# Altium PCB nrf52833_qdaa_var5.PcbDoc
Units mil, origin at the board's own origin, x right, y up, seen from the top; angles counter-clockwise.
Board outline 629.92 x 551.18 mil, 4 copper layers (Top Layer, Mid-Layer 1, Mid-Layer 2, Bottom Layer), stack 93.8 mil thick; 28 components, 37 nets, 98 pads, 57 vias.
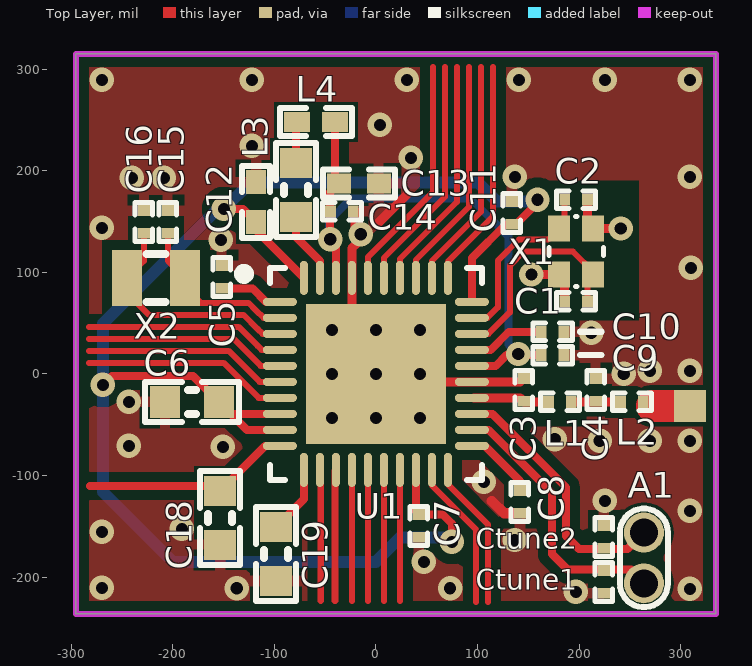
[diagram p0: Top Layer view]
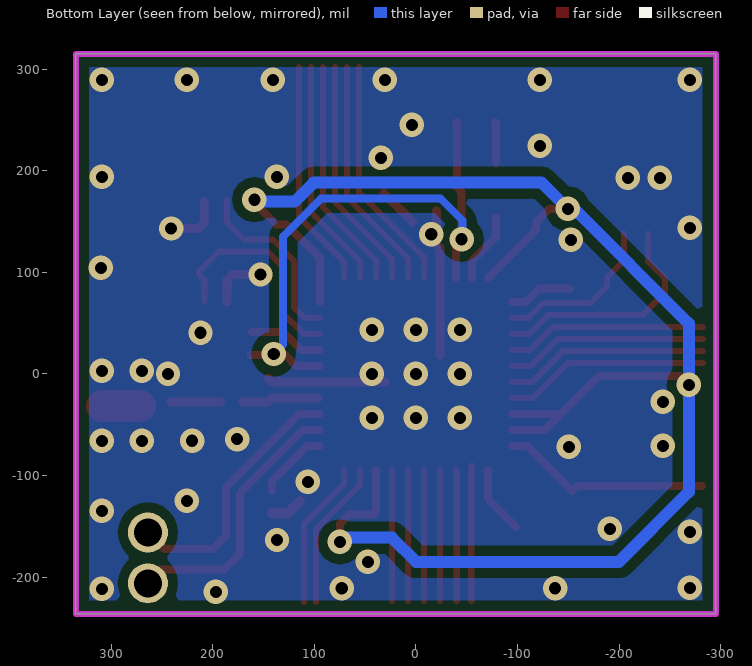
[diagram p1: Bottom Layer view, seen from below]
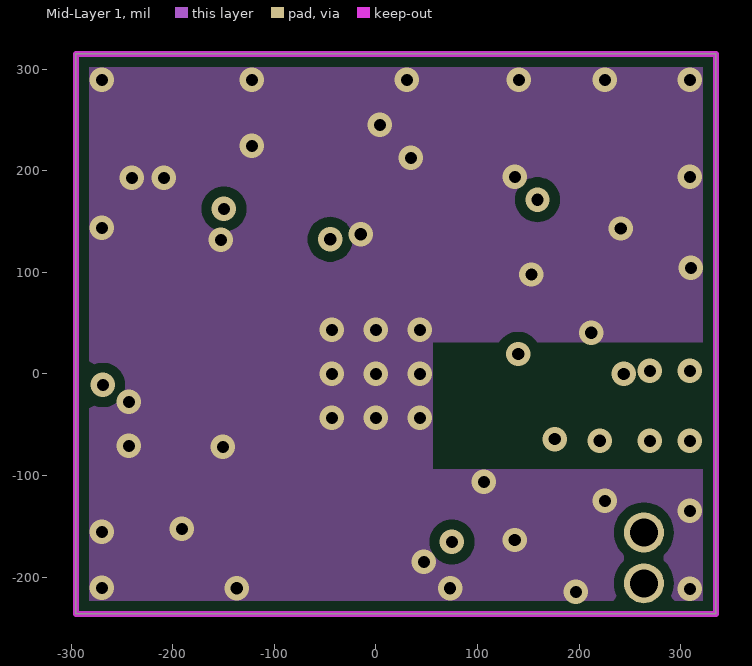
[diagram p2: Mid-Layer 1]
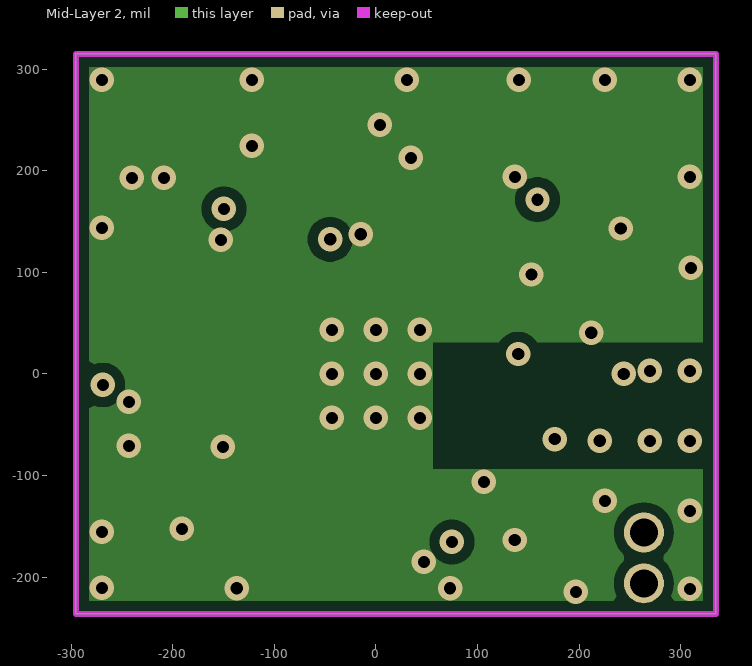
[diagram p3: Mid-Layer 2]
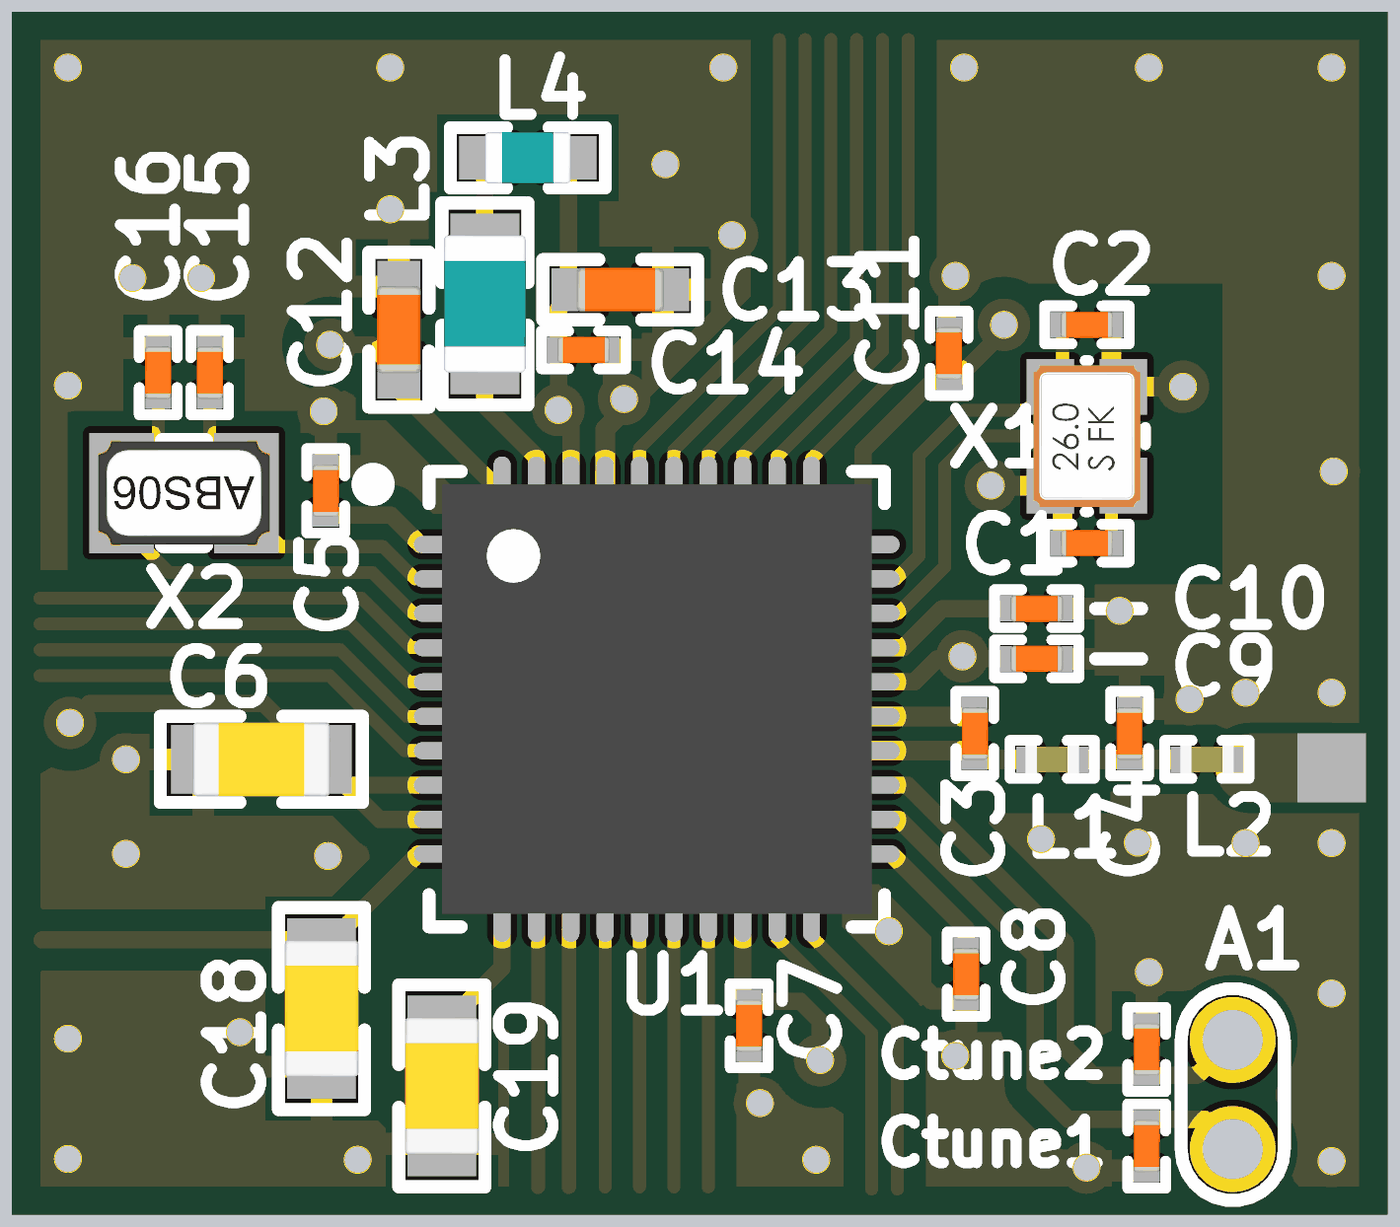
[diagram p4: 3D render of the assembled board from above, using the file's embedded part models]

## Layer stack, top to bottom
Top Solder: solder mask 0.4, Solder Resist, Dk 3.5
Top Layer: signal copper 1.4
Dielectric1: core 63, FR-4, Dk 4.8
Mid-Layer 1: signal copper 1.4
Dielectric2: dielectric 12.6, FR-4, Dk 4.8
Mid-Layer 2: signal copper 1.4
Dielectric3: dielectric 12.6, FR-4, Dk 4.8
Bottom Layer: signal copper 1.4
Bottom Solder: solder mask 0.4, Solder Resist, Dk 3.5

## Board outline
-295.28,-236.22 334.65,-236.22 334.65,314.96 -295.28,314.96

## Design rules (kind name [scope] priority, off if disabled: settings)
Clearance Polygon_ANT [(InNamedPolygon('Top_Layer-GND')) or (InNamedPolygon('Bottom_Layer-GND')) vs InNet('RF')] p1: gap=4.92 ignorepadtopadclearanceinfootprint=FALSE
Clearance Polygon [(InNamedPolygon('Top_Layer-GND')) or (InNamedPolygon('Bottom_Layer-GND')) or (InNamedPolygon('Mid_Layer_1-GND')) or (InNamedPolygon('Mid_Layer_2-GND'))] p2: gap=10 ignorepadtopadclearanceinfootprint=FALSE except(0: Arc-Hole Track-Hole SMDPad-Hole THPad-Hole Via-Hole Fill-Hole Poly-Hole Region-Hole Text-Hole)
Clearance [All] p3: gap=5.91 ignorepadtopadclearanceinfootprint=FALSE
ComponentClearance [All] p1 off: gap=10 collisioncheckmode=3 verticalgap=10 showdistances=FALSE
FabricationTestPointUsage TestPointUsage [All] p1: valid=0 allowmultiple=FALSE
FabricationTestpoint Testpoint [All] p1: side=3 testpointundercomponent=TRUE minsize=40 maxsize=100 preferedsize=60 minholesize=0 maxholesize=40 preferedholesize=32 testpointgrid=1 allowsidetop=TRUE allowsidebottom=TRUE usegrid=TRUE gridtolerance=0.01
Height [All] p1 off: minheight=0 maxheight=1000 prefheight=500
HoleSize [All] p1: absolutevalues=TRUE maxlimit=160 minlimit=12 maxpercent=80.000 minpercent=20.000
MinimumAnnularRing [All] p1 off: minimumring=6
PolygonConnect PolygonConnect_1 [isVia and innet(gnd)] p1: connectstyle=Direct reliefconductorwidth=10 reliefentries=4 polygonreliefangle="90 Angle" airgapwidth=10
PolygonConnect [All] p2: connectstyle=Relief reliefconductorwidth=10 reliefentries=4 polygonreliefangle="90 Angle" airgapwidth=10
RoutingVias [All] p1: holewidth=16 width=32 viastyle="Through Hole" minholewidth=10 minwidth=10 maxholewidth=28 maxwidth=50
SilkToSolderMaskClearance SilkscreenOverComponentPads [IsPad] p1: minsilkscreentomaskgap=10 clearancetoexposedcopper=TRUE
SolderMaskExpansion [All] p1: expansion=3 istentingtop=FALSE
Width [All] p1: maxlimit=100 minlimit=5.91 preferedwidth=5.91
24 further rules are at their usual default settings.

## Components (designator, comment, footprint, x,y, rotation, side; value= is the part's Value field where it differs from the comment)
A1 "NFC Antenna" TP_2x1mm_TH 263.78,-181.1 r180 top
C1 "12pF" CAPC0603X03L_C#1 197,71.5 r180 top
C2 "12pF" CAPC0603X03L_C#1 197,171.5 r0 top
C3 "1.0pF" CAPC0603X03L_C#1 145.67,-15.75 r270 top
C4 "1.2pF" CAPC0603X03L_C#1 216.54,-15.75 r270 top
C5 "100nF" CAPC0603X03L_C#1 -151.57,95.47 r90 top
C6 "4.7µF" CAPC1608X06L -181.1,-27.56 r180 top
C7 "100nF" CAPC0603X03L_C#1 42.32,-149.61 r270 top
C8 "820pF" CAPC0603X03L_C#1 141.73,-125.98 r270 top
C9 "N.C." CAPC0603X03L_C#2 174,18.5 r180 top
C10 "100pF" CAPC0603X03L_C#1 174,41.5 r0 top
C11 "100nF" CAPC0603X03L_C#1 133.86,158.46 r90 top
C12 "1.0µF" CAPC1005X04L -118.11,169.29 r90 top
C13 "1.0µF" CAPC1005X04L -16.75,187.6 r180 top
C14 "47nF" CAPC0603X03L_C#1 -33.5,160.04 r0 top
C15 "12pF" CAPC0603X03L_C#1 -204.72,149.61 r90 top
C16 "12pF" CAPC0603X03L_C#1 -228.35,149.61 r90 top
C18 "4.7µF" CAPC1608X06L -153.54,-141.73 r270 top
C19 "4.7µF" CAPC1608X06L -98.43,-177.17 r270 top
Ctune1 "TBD" CAPC0603X03L_C#1 224.41,-204.72 r270 top
Ctune2 "TBD" CAPC0603X03L_C#1 224.41,-160.43 r270 top
L1 "4.7nH" INDC0603X03L_C 181.1,-27.56 r0 top
L2 "2.2nH" INDC0603X03L_C 251.97,-27.56 r0 top
L3 "10µH" INDC1608X06L -78.74,181.1 r270 top
L4 "15nH" INDC1005X04L -59.06,248.03 r180 top
U1 "nRF52833-QDAA" QFN40P500X500X50_HS-41N 0,0 r0 top locked
X1 "32MHz" BT-XTAL_1612 197,120.5 r90 top
X2 "32.768kHz" XTAL_2012 -216.54,94.49 r180 top

## Footprints (in the part's own frame and the unit in brackets; to place one, negate y for a bottom-side part, rotate by r counter-clockwise, add the part's x,y. Pads: shape width x height; smd on the part's side, far side on the other; paste and mask are expansions set on the pad)
BT-XTAL_1612 [mm] "Crystal 1.6 x 1.2 mm"
  rect 0.65x0.55 smd: 1(-0.575,-0.425) 2(0.575,-0.425) 3(0.575,0.425) 4(-0.575,0.425)
  silkscreen extent -0.88,-0.68 0.88,0.68, body extent -0.83,-0.63 0.83,0.63, height 0.41
CAPC0603X03L_C#1 [mm] "Chip Capacitor, 2-Leads, Body 0.6x0.3mm, IPC High Density"
  rect 0.27x0.3 smd: 1(-0.285,0) 2(0.285,0)
  silkscreen extent -0.49,-0.22 0.49,0.22, body extent -0.3,-0.15 0.31,0.15, height 0.3
CAPC0603X03L_C#2 [mm] "Chip Capacitor, 2-Leads, Body 0.6x0.3mm, IPC High Density"
  rect 0.27x0.3 smd mask+0.05: 1(-0.285,0) 2(0.285,0)
  silkscreen extent -0.49,-0.22 0.49,0.22, body extent -0.3,-0.15 0.31,0.15, height 0.3
CAPC1005X04L [mm] "Chip Capacitor, 2-Leads, Body 1.0x0.5mm, IPC High Density"
  rect 0.6x0.5 smd: 1(-0.5,0) 2(0.5,0)
  silkscreen extent -0.9,-0.35 0.9,0.35, body extent -0.51,-0.25 0.51,0.25, height 0.5
CAPC1608X06L [mm] "Chip Capacitor, 2-Leads, Body 1.6x0.8mm, IPC High Density"
  rect 0.75x0.8 smd: 1(-0.675,0) 2(0.675,0)
  silkscreen extent -1.17,-0.5 1.17,0.5, body extent -0.8,-0.43 0.8,0.43, height 0.8
INDC0603X03L_C [mm] "Chip Inductor, 2-Leads, Body 0.6x0.3mm, IPC High Density"
  rect 0.27x0.3 smd: 1(-0.285,0) 2(0.285,0)
  silkscreen extent -0.49,-0.22 0.49,0.22, body extent -0.31,-0.16 0.31,0.16, height 0.26
INDC1005X04L [mm] "Chip Inductor, 2-Leads, Body 1.0x0.5mm, IPC High Density"
  rect 0.65x0.5 smd: 1(-0.475,0) 2(0.475,0)
  silkscreen extent -0.9,-0.35 0.9,0.35, body extent -0.5,-0.3 0.5,0.3, height 0.5
INDC1608X06L [mm] "Chip Inductor, 2-Leads, Body 1.6x0.8mm, IPC High Density"
  rect 0.75x0.8 smd: 1(-0.675,0) 2(0.675,0)
  silkscreen extent -1.17,-0.5 1.17,0.5, body extent -0.8,-0.48 0.8,0.48, height 0.8
QFN40P500X500X50_HS-41N [mm] "QFN, 40-Leads, Body 5.00x5.00mm, Pitch 0.40mm, Thermal Pad 3.60x3.60mm, IPC Medium Density"
  oval 0.85x0.2 smd: 1(-2.4,1.8) 2(-2.4,1.4) 3(-2.4,1) 4(-2.4,0.6) 5(-2.4,0.2) 6(-2.4,-0.2) 7(-2.4,-0.6) 8(-2.4,-1) 9(-2.4,-1.4) 10(-2.4,-1.8) 21(2.4,-1.8) 22(2.4,-1.4) 23(2.4,-1) 24(2.4,-0.6) 25(2.4,-0.2) 26(2.4,0.2) 27(2.4,0.6) 28(2.4,1) 29(2.4,1.4) 30(2.4,1.8)
  oval 0.2x0.85 smd: 11(-1.8,-2.4) 12(-1.4,-2.4) 13(-1,-2.4) 14(-0.6,-2.4) 15(-0.2,-2.4) 16(0.2,-2.4) 17(0.6,-2.4) 18(1,-2.4) 19(1.4,-2.4) 20(1.8,-2.4) 31(1.8,2.4) 32(1.4,2.4) 33(1,2.4) 34(0.6,2.4) 35(0.2,2.4) 36(-0.2,2.4) 37(-0.6,2.4) 38(-1,2.4) 39(-1.4,2.4) 40(-1.8,2.4)
  rect 3.5x3.5 smd: 41(0,0)
  silkscreen extent -3.42,-2.65 2.65,2.65, body extent -2.5,-2.5 2.5,2.5, height 0.5
TP_2x1mm_TH [mm]
  round 1 hole 0.7: 1(0,-0.635) 2(0,0.635)
  silkscreen extent -0.6,-1.23 0.6,1.23
XTAL_2012 [mm] "XTAL SMD 2.0 x 1.2 mm"
  rect 0.75x1.4 smd: 1(-0.725,0) 2(0.725,0)
  silkscreen extent -0.24,-0.6 0.24,0.6, body extent -1,-0.61 1,0.61, height 0.6

## Part data
A1: library part NFC_ANT_TP, Footprint Doc=TP_2x1mm_TH, LatestRevisionDate=2016-02-23, Part Number=NFC_ANT_TP, Pin Count=2, Published=2016-02-23, Publisher="Nordic Semiconductor"
C1 C2 C15 C16: library part C0201-12p, "Capacitor, NP0, ±2%", Footprint Doc=0201, LatestRevisionDate=2017-11-09, Part Number=C0201-12p, Pin Count=2, Published=2014-11-13, Publisher="Nordic Semiconductor"
C3: library part C0201-1.0p, "Capacitor, NP0, ±5%", Footprint Doc=0201, LatestRevisionDate=2018-10-22, Part Number=C0201-1.0p, Pin Count=2, Published=2014-11-13, Publisher="Nordic Semiconductor"
C4: library part C0201-1.2p, "Capacitor, NP0, ±5%", Footprint Doc=0201, LatestRevisionDate=2014-11-13, Part Number=C0201-1.2p, Pin Count=2, Published=2014-11-13, Publisher="Nordic Semiconductor"
C5 C7 C11: library part C0201-100n, "Capacitor, X7S, ±10%", Footprint Doc=0201, LatestRevisionDate=2017-11-09, Part Number=C0201-100n, Pin Count=2, Published=2014-11-13, Publisher="Nordic Semiconductor"
C6 C19: library part C0603-4µ7-6.3V-X7R, "Capacitor, X7R, ±10%", Footprint Doc=0603, LatestRevisionDate=2015-06-10, Part Number=C0603-4µ7-6.3V-X7R, Pin Count=2, Published=2015-06-10, Publisher="Nordic Semiconductor"
C8: library part C0201-820p, "Capacitor, X7R, ±10%", Assembly="Not required for Bxx and later", Footprint Doc=0201, LatestRevisionDate=2017-11-09, Part Number=C0201-820p, Pin Count=2, Published=2014-11-13, Publisher="Nordic Semiconductor"
C9: library part C0201-N.C., "Not mounted", Assembly="Not mounted", Footprint Doc=0201, LatestRevisionDate=2014-11-13, Part Number=C0201-N.C., Pin Count=2, Published=2014-11-13, Publisher="Nordic Semiconductor"
C10: library part C0201-100p, "Capacitor, NP0, ±5%", Footprint Doc=0201, LatestRevisionDate=2017-11-09, Part Number=C0201-100p, Pin Count=2, Published=2014-11-13, Publisher="Nordic Semiconductor"
C12 C13: library part C0402-1µ0, "Capacitor, X7S, ±10%", Footprint Doc=0402, LatestRevisionDate=2016-08-22, Part Number=C0402-1µ0, Pin Count=2, Published=2009-05-08, Publisher="Nordic Semiconductor"
C14: library part C0201-47n, "Capacitor, X7S, ±10%", Footprint Doc=0201, LatestRevisionDate=2017-11-09, Part Number=C0201-47n, Pin Count=2, Published=2014-11-13, Publisher="Nordic Semiconductor"
C18: library part C0603-4µ7-10V-X7S, "Capacitor, X7S, ±10%", Footprint Doc=0603, LatestRevisionDate=2016-08-15, Part Number=C0603-4µ7-10V-X7S, Pin Count=2, Published=2016-08-15, Publisher="Nordic Semiconductor"
Ctune1 Ctune2: library part C0201-TBD, "Capacitor, X7R, ±10%", Footprint Doc=0201, LatestRevisionDate=2014-11-13, Part Number=C0201-TBD, Pin Count=2, Published=2014-11-13, Publisher="Nordic Semiconductor"
L1: library part L0201-4n7, "High frequency chip inductor ±5%", Footprint Doc=0201, LatestRevisionDate=2013-04-10, Part Number=L0201-4n7, Pin Count=2, Published=2013-04-10, Publisher="Nordic Semiconductor"
L2: library part L0201-2n2, "High frequency chip inductor ±5%", Footprint Doc=0201, LatestRevisionDate=2013-04-10, Part Number=L0201-2n2, Pin Count=2, Published=2013-04-10, Publisher="Nordic Semiconductor"
L3: library part L0603-10µ-TDK, "Chip inductor, IDC,min = 50 mA, ±20%", Footprint Doc=0603, LatestRevisionDate=2012-09-19, Part Number=L0603-10µ-TDK, Pin Count=2, Published=2019-05-06, Publisher="Nordic Semiconductor"
L4: library part L0402-15n, "High frequency chip inductor ±10%", Footprint Doc=0402, LatestRevisionDate=2012-09-19, Part Number=L0402-15n, Pin Count=2, Published=2010-07-12, Publisher="Nordic Semiconductor"
U1: "Multi-protocol Bluetooth Low Energy, IEEE 802.15.4, ANT and 2.4GHz proprietary system-on-chip", Manufacturer="Nordic Semiconductor", Footprint Doc=QFN-40, LatestRevisionDate=2018-12-03, Manufacturer Part Number=nRF52833-QDAA, Part Number=nRF52833-QDAA, Pin Count=40, Published=2018-12-03, Publisher="Nordic Semiconductor"
X1: library part XTAL_SMD1612_32MHz_8pF_General, "XTAL SMD 1612, 32MHz, Cl=8pF, Total Tol: ±40ppm", Footprint Doc=XTAL_1612, LatestRevisionDate=2016-08-19, Part Number=XTAL_SMD1612_32MHz_8pF_General, Pin Count=4, Published=2016-08-19, Publisher="Nordic Semiconductor"
X2: library part XTAL_SMD2012_32.768kHz_9pF_General, "XTAL SMD 2012, 32.768kHz, Cl=9pF, Total Tol: ±50ppm", Footprint Doc=XTAL_2012, LatestRevisionDate=2017-01-11, Part Number=XTAL_SMD2012_32.768kHz_9pF_General, Pin Count=2, Published=2016-08-19, Publisher="Nordic Semiconductor"

## Free pads (board coordinates)
  rect 31.5x31.5 smd mask+3: 0(309.05,-31.5)

## Via types
v1: diameter 24, hole 12, Top Layer to Bottom Layer, tented both sides, 48 vias
v2: diameter 24, hole 12, Top Layer to Bottom Layer, 9 vias

## Nets (pads, with @x,y where several pads share a name; then routed paths per layer and width w, separated by ;. In a path a pad name is that pad's centre, name@x,y a point inside that pad or via, vN(x,y) a via of type N, cw(c..) or ccw(c..) an arc to the next point about the centre after c; other vN are vias at no path point)
D+: U1.13 | length 129.3
  Top Layer w6.5: -40.24,-223.43 -40.24,-95.35 U1.13
D-: U1.12 | length 133.2
  Top Layer w6.5: U1.12@-55.12,-90.55 U1.12 -54.33,-95.28 -54.33,-223.43
DEC1: C5.1 U1.1 | length 62.6
  Top Layer w7.87: C5.1 -121.62,84.25 -108.24,70.87 U1.1
DEC3: C10.1 U1.27 | length 74.9
  Top Layer w7.87: U1.27 112.93,23.62 130.76,41.45 C10.1@162,41.45
DEC4_6: C9.2 C13.2 C14.1 L4.1 U1.26 U1.38 | length 572.2
  Top Layer w7.87: v1(-45,132.5) -45,179.03 -39.37,184.66 C13.2 ; v1@-44.72,132.79 -42.43,130.5 -39.37,130.5 U1.38 ; C13.2@-40.35,187.6 L4.1 L4.1@-39.37,247.05 ; U1.26 117.91,7.87 128.54,18.5 C9.2
  Bottom Layer w7.87: v1@-46,134.5 -46,150.85 -24.42,172.43 93.31,172.43 130.62,135.13 130.62,28.98 v1(140,19.61)
GND: C1.2 C2.2 C3.1 C4.1 C5.2 C6.2 C7.2 C8.2 C9.1 C10.2 C11.2 C12.2 C13.1 C14.2 C15.2 C16.2 C18.2 C19.2 Ctune1.2 Ctune2.1 U1.25 U1.37 U1.41 X1.2 X1.4 | length 455
  Top Layer w9: U1.41@-23.62,18.5 -23.62,123.65 -14.76,132.5 v1@-14.76,143.7 ; C14.2@-20.28,160.04 -20.28,141.78 v1@-15,136.5 ; 3.25,149.5 31.25,177.5 ; U1.41@30.51,-7.87 141.97,-7.87 C3.1@145.32,-4.53 ; v1(153,97.87) X1.4 185.78,92.35 C1.2 ; C2.2@208.22,169.5 208.22,148.65 X1.2 v1(241,143.14)
  Top Layer w10: 114,-125 126.2,-137.2 C8.2
  other v1: 196.85,-214.57 309.06,-211.61 -269.69,-210.63 -137,-211 73,-211 47.24,-185.04 136.73,-163.42 -269.69,-155.51 -190.94,-152.56 309.06,-134.84 225.39,-125 106.3,-106.3 -150.59,-71.85 -243.11,-70.87 220.32,-65.73 269.68,-65.94 309.06,-65.94 176,-64.13 -243.11,-27.56 244,0 269.68,2.95 309.06,2.95 212,40.5 310.04,104.33 -152.56,131.89 -15,137.49 -269.69,143.7 -240.16,192.91 -208.66,192.91 136.81,193.9 309.06,193.9 34.45,212.6 -122.05,224.41 3.94,245.08 -269.69,289.37 -122.05,289.37 30.51,289.37 140.75,289.37 225.39,289.37 309.06,289.37
  other v2: -43.31,-43.31 0,-43.31 43.31,-43.31 -43.31,0 0,0 43.31,0 -43.31,43.31 0,43.31 43.31,43.31
NetC3_2: C3.2 L1.1 U1.24 | length 75.1
  Top Layer w9: U1.24@96.46,-23.62 141.97,-23.62 145.32,-26.97 145.9,-27.56 L1.1
NetC4_2: C4.2 L1.2 L2.1 | length 48.4
  Top Layer w9: L1.2 L2.1
NetC8_1: C8.1 U1.21 | length 71
  Top Layer w7.87: U1.21 107.28,-70.87 141.73,-105.31 C8.1
NetC19_1: C19.1 U1.11 | length 67.5
  Top Layer w7.87: C19.1 -70.87,-123.03 U1.11
NetL3_1: L3.1 L4.2 | length 40.8
  Top Layer w7.87: L3.1 -78.74,247.05 L4.2
NetL3_2: L3.2 U1.39 | length 69.8
  Top Layer w7.87: L3.2 -78.74,134.64 -55.12,111.02 U1.39
NFC1: A1.2 Ctune1.1 U1.22 | length 267.9
  Top Layer w7.87: U1.22 111.02,-55.12 173.23,-117.32 173.23,-177.17 188.58,-192.52 A1.2@250.2,-192.52 ; A1.2@251.18,-192.52 A1.2@250.2,-192.52 ; A1.2 A1.2@250.2,-192.52
NFC2: A1.1 Ctune2.2 U1.23 | length 259
  Top Layer w7.87: U1.23 114.76,-39.37 187.01,-111.62 187.01,-159.45 199.8,-172.24 247.64,-172.24 A1.1
P0.00/XL1: C15.1 U1.2 X2.1 | length 165.8
  Top Layer w5.91: C15.1 -204.72,111.22 X2.1 -187.99,85.63 -172.24,69.88 -125.41,69.88 -118.18,62.65 -118.11,62.65 -110.58,55.12 U1.2
P0.01/XL2: C16.1 U1.3 X2.2 | length 232.9
  Top Layer w5.91: C16.1 -228.35,111.22 X2.2 -245.08,79.72 -223.43,58.07 -130.31,58.07 -116.21,43.97 -116.14,43.97 -111.54,39.37 U1.3
P0.02/AIN0: U1.32 | length 227.7
  Top Layer w5.91: U1.32 55.12,111.19 103.35,159.42 103.35,302.17
P0.03/AIN1: U1.31 | length 226
  Top Layer w5.91: U1.31 70.87,110.24 115.16,154.53 115.16,302.17
P0.04/AIN2: U1.4 | length 197.4
  Top Layer w5.91: -282.48,46.26 -135.2,46.26 -116.5,27.56 -116.43,27.56 -112.49,23.62 U1.4
P0.05/AIN3: U1.5 | length 199
  Top Layer w5.91: -282.48,34.45 -140.09,34.45 -113.51,7.87 U1.5
P0.11: U1.7 | length 202.3
  Top Layer w5.91: -282.48,10.83 -149.87,10.83 -115.43,-23.62 U1.7
P0.15: U1.14 | length 128.9
  Top Layer w5.91: -23.62,-223.43 U1.14
P0.17: U1.15 | length 128.9
  Top Layer w5.91: -7.87,-223.43 U1.15
P0.18/RESET: U1.16 | length 128.9
  Top Layer w5.91: 7.87,-223.43 U1.16
P0.20: U1.17 | length 128.9
  Top Layer w5.91: 23.62,-223.43 U1.17
P0.28/AIN4: U1.33 | length 229.3
  Top Layer w5.91: U1.33 39.37,112.15 91.54,164.31 91.54,302.17
P0.29/AIN5: U1.34 | length 230.9
  Top Layer w5.91: U1.34 23.62,113.1 79.72,169.2 79.72,302.17
P0.30/AIN6: U1.35 | length 232.5
  Top Layer w5.91: U1.35 7.87,114.06 67.91,174.1 67.91,302.17
P0.31/AIN7: U1.36 | length 234.2
  Top Layer w5.91: U1.36 -7.87,115.01 56.1,178.99 56.1,302.17
P1.09: U1.6 | length 200.6
  Top Layer w5.91: -282.48,22.64 -144.98,22.64 -114.47,-7.87 U1.6
RF: L2.2 pad.0 | length 37.4
  Top Layer w31.5: 271.65,-31.5 pad.0
SWDCLK: U1.20 | length 146.2
  Top Layer w5.91: U1.20 70.87,-108.68 110.24,-148.05 110.24,-224.36
SWDIO: U1.19 | length 147.8
  Top Layer w5.91: U1.19 55.12,-109.63 98.43,-152.94 98.43,-224.36
VBUS: C18.1 U1.10 | length 207.4
  Top Layer w7.87: -281.5,-110.24 -158.46,-110.24 C18.1 -109.25,-70.87 U1.10
VDD_NRF: C6.1 C7.1 C11.1 C12.1 U1.8 U1.9 U1.18 U1.30 U1.40 | length 1633.6
  Top Layer w7.87: v1(-268.7,-10.83) -259.84,-1.97 -180.12,-1.97 C6.1 C6.1@-142.72,-39.37 ; v1(-149.61,162.4) -130.91,162.4 C12.1 -118.11,141.73 U1.40 ; U1.9 -126.97,-55.12 C6.1@-142.72,-39.37 ; U1.8 C6.1@-142.72,-39.37 ; U1.18 39.37,-135.43 C7.1 65.78,-138.39 74.8,-147.41 v1(74.8,-165.35) ; U1.30 94.49,113.99 127.74,147.24 C11.1 137.74,147.24 v1@160,169.5
  Bottom Layer w11.81: v1(74.8,-165.35) 70.68,-161.23 23.62,-161.23 -0.15,-185 -199.84,-185 -268.7,-116.14 v1(-268.7,-10.83) -268.7,49.42 -155.72,162.4 v1(-149.61,162.4) -123.83,188.18 100.6,188.18 119.28,169.5 v1@160,169.5
  other v1: 159,171.5
XC1: C1.1 U1.28 X1.1 | length 219.4
  Top Layer w5.91: U1.28 110.59,39.37 131.89,60.67 131.89,106.62 145.77,120.5 193.78,120.5 213.73,100.55 X1.1 208.22,92.35 C1.1
XC2: C2.1 U1.29 X1.3 | length 179.8
  Top Layer w5.91: U1.29 109.63,55.12 120.08,65.57 120.08,111.52 140.88,132.31 169.44,132.31 X1.3 185.78,148.65 C2.1

## Polygon pours and split planes (outlines as drawn)
GND on Mid-Layer 1 "Mid_Layer_1-GND" (solid, remove dead copper, pour order 1011): -353,410 -353,-266.19 363,-266.19 363,410 -353,410
GND on Mid-Layer 2 "Mid_Layer_2-GND" (solid, remove dead copper, pour order 1013): -353,410 -353,-266.19 363,-266.19 363,410 -353,410
GND on Bottom Layer "Bottom_Layer-GND" (solid, remove dead copper, pour order 1001): -373,400 -373,-266.19 394,-266.19 394,400 -373,400
GND on Top Layer "Top_Layer-GND" (solid, remove dead copper, pour order 1000): -353,410 -353,-266.19 363,-266.19 363,410 -353,410

## Keep-outs
Keep-Out Layer:
  the board outline again, w6

## Other copper
Top Layer:
  pour cut-out: 137.8,7.5 203.74,7.5 203.74,-10.83 207.68,-10.83 207.68,-52.17 137.8,-52.17
  pour cut-out: 259,52.5 259,190.5 140.27,190.5 140.27,52.5
Mid-Layer 1:
  pour cut-out: 334.65,-93.94 56,-93.94 56,30.95 334.65,30.95
Mid-Layer 2:
  pour cut-out: 334.65,-93.94 56,-93.94 56,30.95 334.65,30.95

## Silkscreen, mask and mechanical layers (free items; w line width, h text height)
Top Overlay:
  lines w6: 201,18.5 222,18.5 ; 201,41.5 222,41.5
Mechanical 1:
  the board outline again, w6

## Dimensions
334.65,314.96 to 334.65,-236.22 on Mechanical 3
-295.28,-236.22 to 334.65,-236.22 on Mechanical 3